# EAGLE board side (EAGLE 9.6.1)
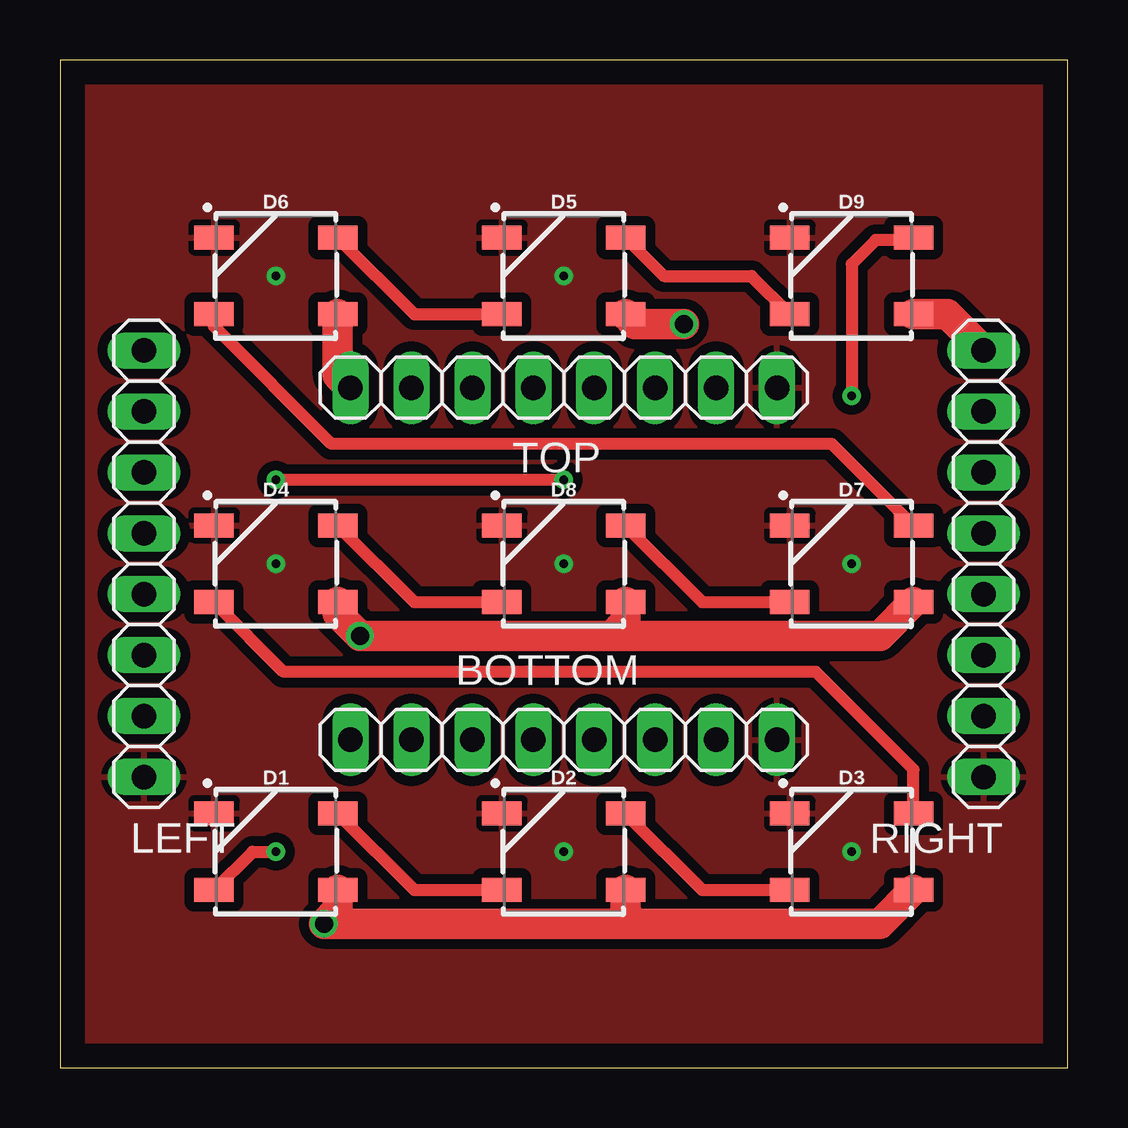
[diagram p0: board, top side]
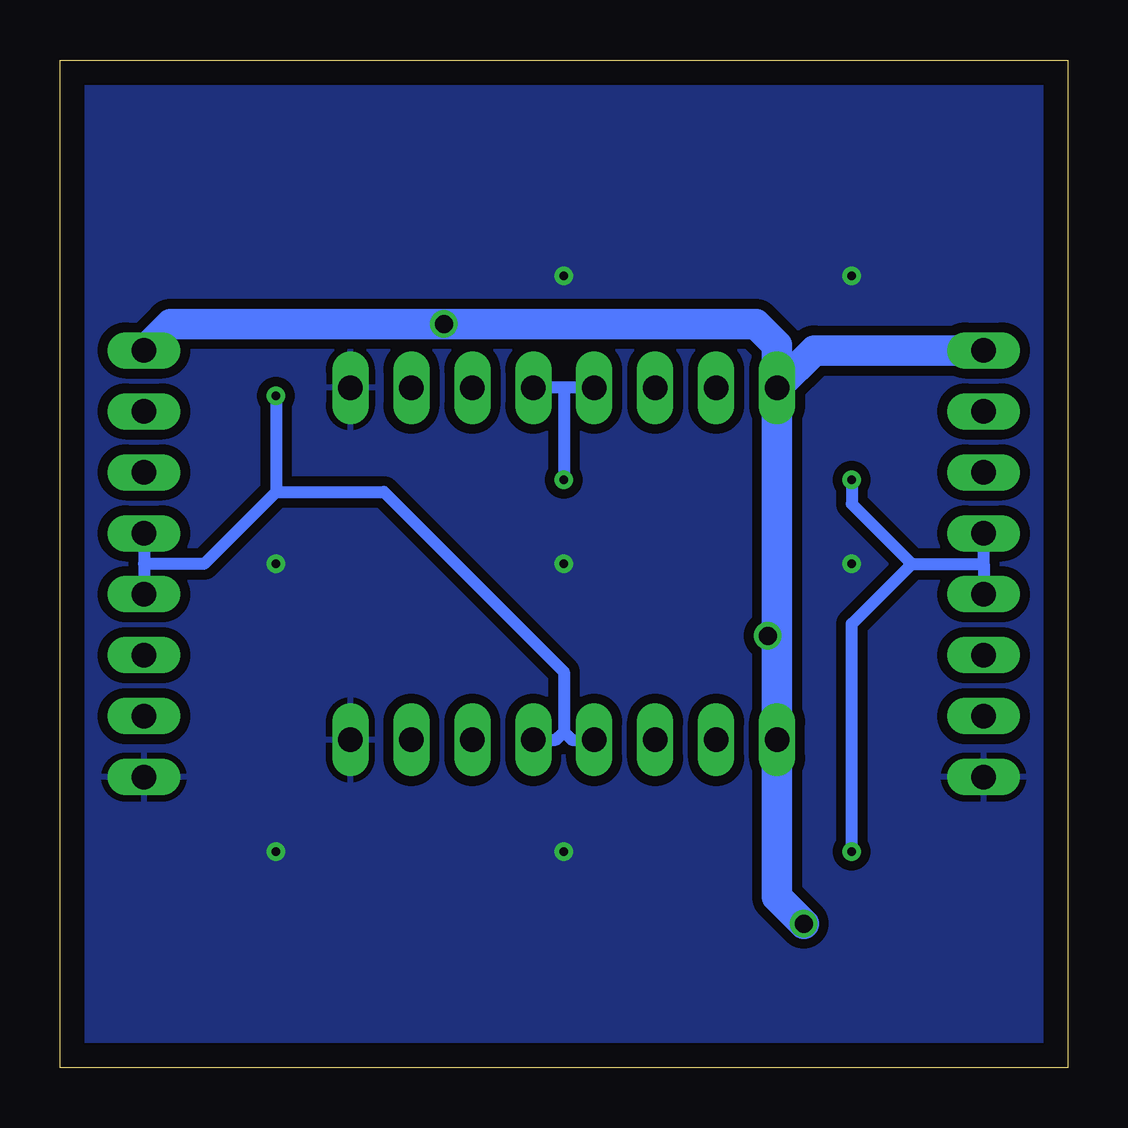
[diagram p1: board, bottom side, seen from below]

Size 42 x 42 mm. Coordinates in mm from the lower left corner, seen from the top.
Outline: 0,0 42,0 42,42 0,42 0,0
Copper layers (1*16): Top 0.035mm / dielectric 1.5mm / Bottom 0.035mm
Design rules "default *": minimum track width 6mil, minimum drill 0.35mm, track to track 6mil, track to pad 6mil, pad to pad 6mil, via to via 6mil, smd to smd 6mil, copper to edge 40mil, drill to drill 6mil, minimum pad ring 10mil, minimum via ring 8mil, stop-mask expansion 4mil, vias tented up to drill 100mil, thermal gap 10mil
Net classes: 1 pow_width: width 0.102 mm

## Footprints (pad centres in the part's own frame; a part is rotated, then mirrored left to right if it is on the bottom)
1X08 = drill 1.016 long: 1 -8.89,0; 2 -6.35,0; 3 -3.81,0; 4 -1.27,0; 5 1.27,0; 6 3.81,0; 7 6.35,0; 8 8.89,0
WS2812B = smd 1.651 x 1: 1 2.577,-1.6; 2 2.577,1.6; 3 -2.577,1.6; 4 -2.577,-1.6

## Placement (x,y rotation side)
BOTTOM  [1X08]  21,13.66 0 top
D1  WS2812B  [WS2812B]  9,9 0 top
D2  WS2812B  [WS2812B]  21,9 0 top
D3  WS2812B  [WS2812B]  33,9 0 top
D4  WS2812B  [WS2812B]  9,21 0 top
D5  WS2812B  [WS2812B]  21,33 0 top
D6  WS2812B  [WS2812B]  9,33 0 top
D7  WS2812B  [WS2812B]  33,21 0 top
D8  WS2812B  [WS2812B]  21,21 0 top
D9  WS2812B  [WS2812B]  33,33 0 top
LEFT  [1X08]  3.5,21 90 top
RIGHT  [1X08]  38.5,21 90 top
TOP  [1X08]  21,28.34 180 top

## Library data of the parts
BOTTOM LEFT RIGHT TOP = pinhead
D1-D9 = my-LED-cube; PROD_ID: DIO-12503

## Nets
DI: D1.4 LEFT.4 LEFT.5 TOP.4 TOP.5
DO: BOTTOM.4 BOTTOM.5 D9.2 RIGHT.4 RIGHT.5
GND: BOTTOM.8 D1.3 D2.3 D3.3 D4.3 D5.3 D6.3 D7.3 D8.3 D9.3 LEFT.1 RIGHT.1 TOP.1
N$1: D4.2 D8.4
N$2: D7.4 D8.2
N$3: D1.2 D2.4
N$4: D2.2 D3.4
N$5: D3.2 D4.4
N$6: D6.4 D7.2
N$7: D5.2 D9.4
N$16: D5.4 D6.2
VDD [pow_width]: BOTTOM.1 D1.1 D2.1 D3.1 D4.1 D5.1 D6.1 D7.1 D8.1 D9.1 LEFT.8 RIGHT.8 TOP.8

## Tracks (layer width: path | path; a pad name or v marks a point on that pad's centre or on a via)
DI  (via drill 0.35)
  Top 0.508: D1.4 8.02,9 v9,9 | v21,24.5 v9,24.5
  Bottom 0.508: v9,9 9,18.5 6.5,21 | 6.5,21 3.5,21 | 3.5,21 LEFT.5 | 3.5,21 LEFT.4 | TOP.5 21,28.34 | 21,28.34 TOP.4 | 21,28.34 v21,24.5 | v9,24.5 9,23.5 6.5,21
DO  (via drill 0.35)
  Top 0.508: D9.2 35.48,34.5 34,34.5 33,33.5 v33,28
  Bottom 0.508: 33,24 36,21 38.5,21 | RIGHT.5 38.5,21 | v33,28 33,24 | 38.5,21 RIGHT.4 | 33,24 28.5,24 21,16.5 21,14 | 21,14 20.66,13.66 BOTTOM.4 | BOTTOM.5 21.34,13.66 21,14
GND  (via drill 0.35)
  other vias: 21,9 33,9 9,21 21,21 33,21 21,33 9,33
  pour Top (isolate 0.406): 0,0 0,42 42,42 42,0
  pour Bottom (isolate 0.406): 0,0 0,42 42,42 42,0
N$1
  Top 0.508: D4.2 14.78,19.4 D8.4
N$2
  Top 0.508: D8.2 26.78,19.4 D7.4
N$3
  Top 0.508: D1.2 14.78,7.4 D2.4
N$4
  Top 0.508: D2.2 26.78,7.4 D3.4
N$5
  Top 0.508: D3.2 35.58,12.42 31.5,16.5 9.32,16.5 D4.4
N$6
  Top 0.508: D7.2 32.18,26 11.32,26 6.42,30.9 D6.4
N$7
  Top 0.508: D5.2 25.18,33 28.82,33 D9.4
N$16
  Top 0.508: D6.2 14.78,31.4 D5.4
VDD  (via drill 0.75)
  Top 1.27: D3.1 34.18,6 24,6 | 24,6 v11,6 11.58,6.58 D1.1 | D2.1 23.58,6.42 24,6 | D4.1 11.58,18.92 v12.5,18 23,18 | 23,18 34.18,18 D7.1 | D8.1 23.58,18.58 23,18 | TOP.8 11.58,28.87 D6.1 | D9.1 36.99,31.4 RIGHT.8 | v26,31 23.98,31 D5.1
  Bottom 0.508: v12.5,18 12.11,18
  Bottom 1.27: TOP.8 12.11,18 BOTTOM.1 12.11,7.11 v11,6 | TOP.8 10.56,29.89 LEFT.8 | TOP.8 12.11,30.11 13,31 v26,31 37.39,31 RIGHT.8